# EAGLE board MCU v19 (EAGLE 9.7.0)
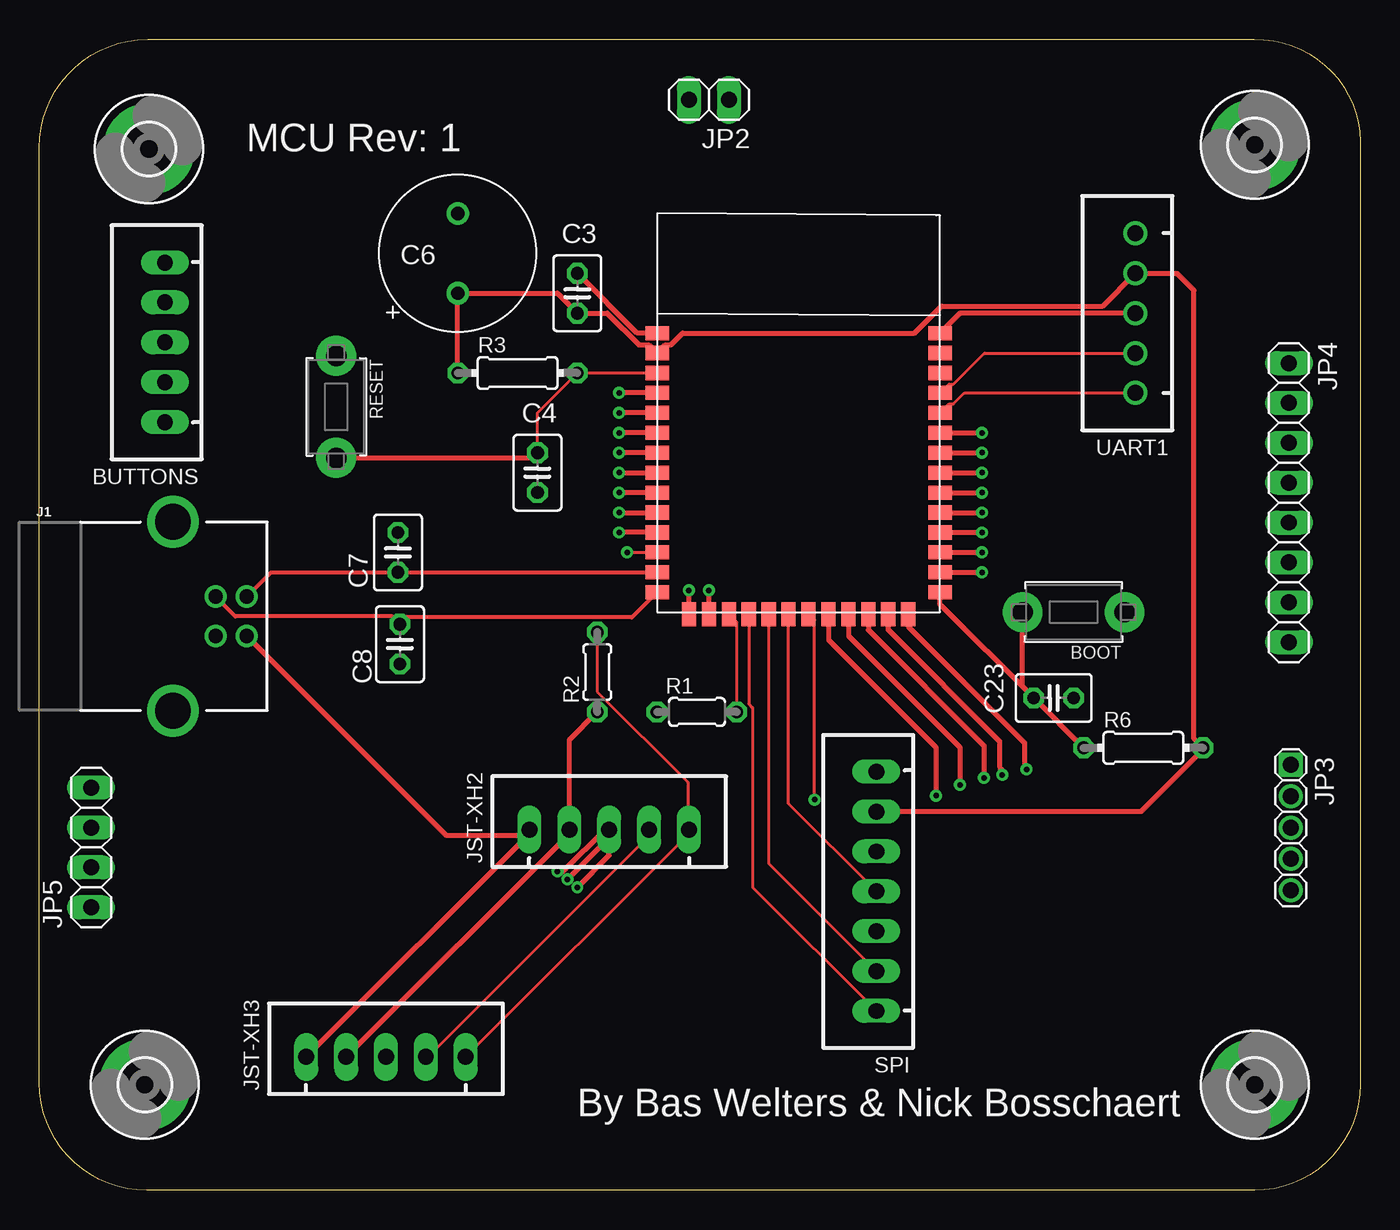
[diagram p0: board, top side]
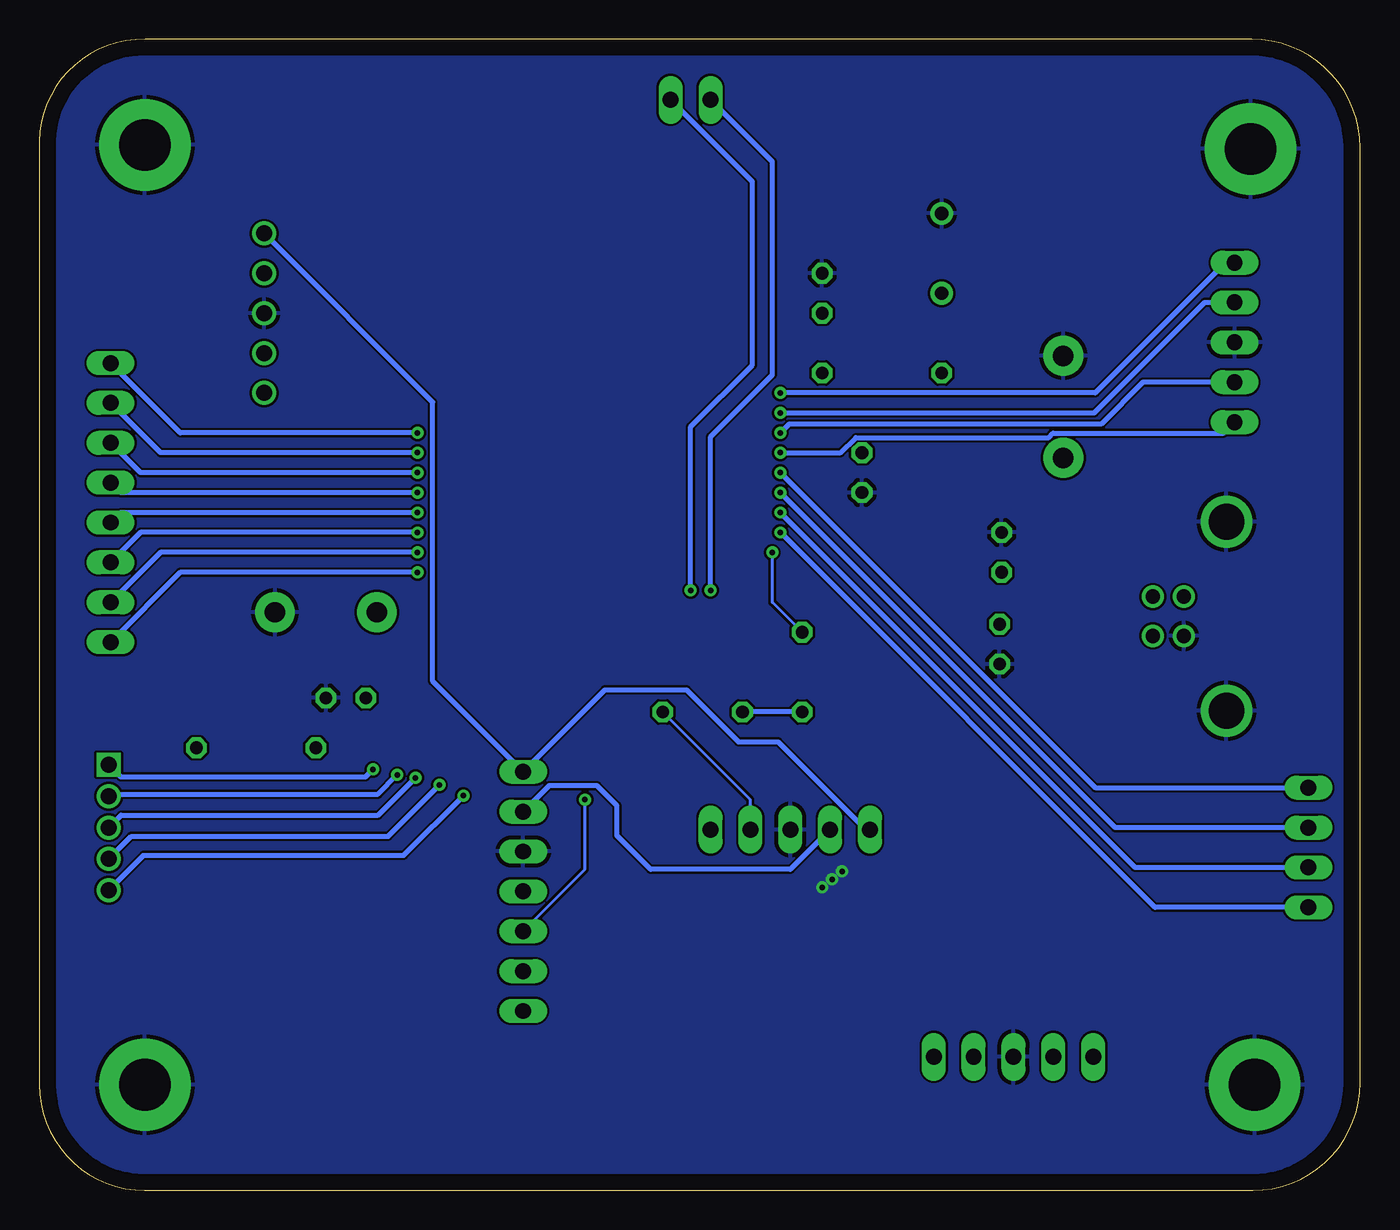
[diagram p1: board, bottom side, seen from below]

Size 84.18 x 73.33 mm. Coordinates in mm from the lower left corner, seen from the top.
Outline: 6.86,0 arc-90 0,6.86 0,66.42 arc-90 6.91,73.33 77.44,73.33 arc-90 84.18,66.84 84.18,6.73 arc-90 77.45,0 6.86,0
Copper layers (1*16): Top 0.035mm / dielectric 1.5mm / Bottom 0.035mm
Design rules "default": minimum track width 6mil, minimum drill 0.35mm, track to track 6mil, track to pad 6mil, pad to pad 6mil, via to via 6mil, smd to smd 6mil, copper to edge 40mil, drill to drill 6mil, minimum pad ring 10mil, minimum via ring 8mil, stop-mask expansion 4mil, vias tented up to drill 0mil, thermal gap 10mil

## Footprints (pad centres in the part's own frame; a part is rotated, then mirrored left to right if it is on the bottom)
TACT_PANA-EVQ = drill 1.3 pad 2.54: P$1 -3.25,0; P$2 3.25,0
JST-XH-05-PACKAGE-LONG-PAD = drill 1.016 long: 1 -5.08,0; 2 -2.54,0; 3 0,0; 4 2.54,0; 5 5.08,0
C025-030X050 = drill 0.813 octagon: 1 -1.27,0; 2 1.27,0
CAPPRD508W65D1000H1100B = drill 0.85 pad 1.45: 1 -2.54,0; 2 2.54,0
3,3-PAD = drill 3.3 pad 5.842: B3,3 0,0
USB-B-PTH = drill 0.914 pad 1.422: D+ 4,1.25; D- 5.981,1.25; GND 4,-1.25; VBUS 5.981,-1.25 | drill 2.286: SHLD1 1.282,-6.02; SHLD2 1.282,6.02
1X02 = drill 1.016 long: 1 -1.27,0; 2 1.27,0
1_05X2MM = drill 1.016 pad 1.3 square: 1 -4,0 | drill 1.016 pad 1.3: 2 -2,0; 3 0,0; 4 2,0; 5 4,0
1X08 = drill 1.016 long: 1 -8.89,0; 2 -6.35,0; 3 -3.81,0; 4 -1.27,0; 5 1.27,0; 6 3.81,0; 7 6.35,0; 8 8.89,0
1X04 = drill 1.016 long: 1 -3.81,0; 2 -1.27,0; 3 1.27,0; 4 3.81,0
0204/5 = drill 0.813 octagon: 1 -2.54,0; 2 2.54,0
0204/7 = drill 0.813 octagon: 1 -3.81,0; 2 3.81,0
JST-XH-07-PACKAGE-LONG-PAD = drill 1.016 long: 1 -7.62,0; 2 -5.08,0; 3 -2.54,0; 4 0,0; 5 2.54,0; 6 5.08,0; 7 7.62,0
ESP32-S3-WROOM-1 = smd 1.5 x 0.9: 3V3 0,-8.89; EN 0,-10.16; GND1 0,-7.62; GND2 18.034,-7.62; IO0 18.034,-24.13; IO1 18.034,-8.89; IO2 18.034,-10.16; IO4 0,-11.43; IO5 0,-12.7; IO6 0,-13.97; IO7 0,-15.24; IO8 0,-21.59; IO15 0,-16.51; IO16 0,-17.78; IO17 0,-19.05; IO18 0,-20.32; IO19 0,-22.86; IO20 0,-24.13; IO35 18.034,-22.86; IO36 18.034,-21.59; IO37 18.034,-20.32; IO38 18.034,-19.05; IO39 18.034,-17.78; IO40 18.034,-16.51; IO41 18.034,-15.24; IO42 18.034,-13.97; RXD0 18.034,-12.7; TXD0 18.034,-11.43 | smd 0.9 x 1.5: IO3 2.032,-25.527; IO9 4.572,-25.527; IO10 5.842,-25.527; IO11 7.112,-25.527; IO12 8.382,-25.527; IO13 9.652,-25.527; IO14 10.922,-25.527; IO21 12.192,-25.527; IO45 16.002,-25.527; IO46 3.302,-25.527; IO47 13.462,-25.527; IO48 14.732,-25.527
JST-XH-05-PACKAGE-ROUND-PAD = drill 1.016: 1 -5.08,0; 2 -2.54,0; 3 0,0; 4 2.54,0; 5 5.08,0

## Placement (x,y rotation side)
BOOT  [TACT_PANA-EVQ]  65.91,36.83 180 top
BUTTONS  Control Buttons  [JST-XH-05-PACKAGE-LONG-PAD]  8.01,54.03 90 top
C3  0.1uF  [C025-030X050]  34.29,57.15 90 top
C4  0.1uF  [C025-030X050]  31.75,45.72 90 top
C6  10uF  [CAPPRD508W65D1000H1100B]  26.67,59.69 90 top
C7  TBD  [C025-030X050]  22.86,40.64 90 top
C8  TBD  [C025-030X050]  22.99,34.8 270 top
C23  0.1uF  [C025-030X050]  64.64,31.37 180 top
H1  MOUNT-PAD-ROUND3.3  [3,3-PAD]  77.45,6.73 0 top
H2  MOUNT-PAD-ROUND3.3  [3,3-PAD]  6.73,6.73 0 top
H3  MOUNT-PAD-ROUND3.3  [3,3-PAD]  77.45,66.6 0 top
H4  MOUNT-PAD-ROUND3.3  [3,3-PAD]  6.99,66.34 0 top
J1  USB_B_PTH  [USB-B-PTH]  7.24,36.58 0 top
JP2  [1X02]  42.67,69.47 180 top
JP3  [1_05X2MM]  79.76,23.11 270 top
JP4  [1X08]  79.63,43.81 270 top
JP5  [1X04]  3.3,21.84 90 top
JST-XH2  I2C-BUS  [JST-XH-05-PACKAGE-LONG-PAD]  36.32,22.99 0 top
JST-XH3  I2C-BUS  [JST-XH-05-PACKAGE-LONG-PAD]  22.1,8.51 0 top
R1  2k2  [0204/5]  41.91,30.48 0 top
R2  2k2  [0204/5]  35.56,33.02 90 top
R3  10k  [0204/7]  30.48,52.07 0 top
R6  10k  [0204/7]  70.36,28.19 0 top
RESET  [TACT_PANA-EVQ]  18.92,49.91 270 top
SPI  SPI-Header  [JST-XH-07-PACKAGE-LONG-PAD]  53.34,19.05 90 top
U$1  ESP32-S3-WROOM-1  [ESP32-S3-WROOM-1]  39.37,62.23 0 top
UART1  UART  [JST-XH-05-PACKAGE-ROUND-PAD]  69.85,55.88 90 top

## Library data of the parts
BOOT RESET = adafruit
BUTTONS JST-XH2 JST-XH3 SPI UART1 = Rembrandt Electronics - JST XH Connectors v1-0
C3 C4 C7 C8 C23 = rcl; SPICEPREFIX: C
C6 = Capacitor; CATEGORY: Capacitor
H1-H4 = holes
J1 = SparkFun-Connectors; PROD_ID: CONN-08278; SF_ID: PRT-00139
JP2-JP5 = pinhead
R1-R3 R6 = rcl; SPICEPREFIX: R
U$1 = RobotMower_Eagle_Library

## Nets
3V3: C3.1 C6.1 JST-XH2.2 JST-XH3.2 R1.1 R2.1 R3.1 R6.2 SPI.6 U$1.3V3 UART1.4
5V: J1.VBUS JST-XH2.1 JST-XH3.1 SPI.7 UART1.5
B1: BUTTONS.5 U$1.IO4
B2: BUTTONS.4 U$1.IO5
B3: BUTTONS.2 U$1.IO6
B4: BUTTONS.1 U$1.IO7
BOOT: BOOT.P$2 C23.2 R6.1 U$1.IO0
CS: SPI.1 U$1.IO10
D+: C8.1 J1.D+ U$1.IO20
D-: C7.1 J1.D- U$1.IO19
EN: C4.2 R3.2 RESET.P$2 U$1.EN
GND: BOOT.P$1 BUTTONS.3 C3.2 C4.1 C6.2 C7.2 C8.2 C23.1 H1.B3,3 H2.B3,3 H3.B3,3 H4.B3,3 J1.GND J1.SHLD1 J1.SHLD2 JST-XH2.3 JST-XH3.3 RESET.P$1 SPI.5 U$1.GND1 U$1.GND2 UART1.3
IO3: JP2.2 U$1.IO3
IO14: JP3.5 U$1.IO14
IO15: JP5.4 U$1.IO15
IO16: JP5.3 U$1.IO16
IO17: JP5.2 U$1.IO17
IO18: JP5.1 U$1.IO18
IO21: JP3.4 U$1.IO21
IO35: JP4.8 U$1.IO35
IO36: JP4.7 U$1.IO36
IO37: JP4.6 U$1.IO37
IO38: JP4.5 U$1.IO38
IO39: JP4.4 U$1.IO39
IO40: JP4.3 U$1.IO40
IO41: JP4.2 U$1.IO41
IO42: JP4.1 U$1.IO42
IO45: JP3.1 U$1.IO45
IO46: JP2.1 U$1.IO46
IO47: JP3.3 U$1.IO47
IO48: JP3.2 U$1.IO48
MISO: SPI.3 U$1.IO13
MOSI: SPI.2 U$1.IO11
RX: U$1.RXD0 UART1.1
SCK: SPI.4 U$1.IO12
SCL: JST-XH2.5 JST-XH3.5 R2.2 U$1.IO8
SDA: JST-XH2.4 JST-XH3.4 R1.2 U$1.IO9
TX: U$1.TXD0 UART1.2

## Tracks (layer width: path | path; a pad name or v marks a point on that pad's centre or on a via)
3V3
  Top 0.305: R3.1 C6.1 33.02,57.15 C3.1 36.18,55.88 38.21,53.85 38.85,53.85 U$1.3V3 39.88,53.85 40.25,53.85 41,54.61 55.77,54.61 57.5,56.34 67.77,56.34 UART1.4 69.87,58.4 72.52,58.4 73.58,57.34 73.58,28.78 R6.2 74.17,28.1 70.2,24.13 SPI.6 | JST-XH3.2 33.78,22.73 JST-XH2.2 33.78,28.7 R2.1
  Bottom 0.305: SPI.6 51.69,25.78 48.64,25.78 47.37,24.51 47.37,22.61 45.21,20.45 36.32,20.45 JST-XH2.2 | R2.1 R1.1
5V
  Top 0.305: J1.VBUS 25.93,22.61 30.87,22.61 JST-XH2.1 31.24,22.73 JST-XH3.1
  Bottom 0.305: UART1.5 59.11,50.22 59.11,32.44 SPI.7 48.13,31.88 42.93,31.88 39.62,28.57 37.1,28.57 31.51,22.99 JST-XH2.1
B1  (via drill 0.35)
  Top 0.305: U$1.IO4 v36.96,50.8
  Bottom 0.305: BUTTONS.5 8.59,59.11 16.89,50.8 v36.96,50.8
B2  (via drill 0.35)
  Top 0.305: U$1.IO5 v36.96,49.53
  Bottom 0.305: v36.96,49.53 16.95,49.53 9.91,56.57 BUTTONS.4
B3  (via drill 0.35)
  Top 0.305: U$1.IO6 v36.96,48.26
  Bottom 0.305: BUTTONS.2 13.84,51.49 16.51,48.82 36.4,48.82 v36.96,48.26
B4  (via drill 0.35)
  Top 0.305: U$1.IO7 v36.96,46.99
  Bottom 0.305: BUTTONS.1 8.72,48.24 19.58,48.24 19.86,47.95 32.15,47.95 33.12,46.99 v36.96,46.99
BOOT
  Top 0.305: C23.2 57.4,37.34 U$1.IO0 | C23.2 62.66,32.08 BOOT.P$2 | C23.2 R6.1
CS
  Top 0.203: U$1.IO10 45.21,31.01 45.47,30.76 45.47,19.3 SPI.1
D+
  Top 0.254: U$1.IO20 37.77,36.5 23.42,36.5 C8.1 22.48,36.57 12.49,36.57 J1.D+
D-
  Top 0.254: J1.D- 14.76,39.37 C7.1 U$1.IO19
EN
  Top 0.203: U$1.EN R3.2 31.75,49.53 31.75,47.12 C4.2
  Top 0.305: RESET.P$2 31.29,46.66 31.75,47.12
GND  (via drill 0.35)
  Top 0.305: U$1.GND1 38.1,54.61 C3.2 | U$1.GND2 58.67,55.88 UART1.3 | v33.65,19.81 36.32,22.48 JST-XH2.3 | v33.02,20.32 33.39,20.32 36.05,22.99 JST-XH2.3 | v34.29,19.3 36.32,21.34 JST-XH2.3
  pour Bottom: -0.69,0.84 84.51,0.84 84.51,73.2 -0.69,73.2
IO3  (via drill 0.35)
  Top 0.305: U$1.IO3 v41.4,38.23
  Bottom 0.305: v41.4,38.23 41.4,48.01 37.46,51.94 37.46,65.53 JP2.2
IO14  (via drill 0.35)
  Top 0.305: U$1.IO14 50.3,35.06 57.15,28.21 v57.15,25.15
  Bottom 0.305: v57.15,25.15 60.96,21.34 77.53,21.34 JP3.5
IO15  (via drill 0.35)
  Top 0.305: v36.96,45.72 U$1.IO15
  Bottom 0.305: v36.96,45.72 16.89,25.65 JP5.4
IO16  (via drill 0.35)
  Top 0.305: U$1.IO16 v36.96,44.45
  Bottom 0.305: JP5.3 15.62,23.11 v36.96,44.45
IO17  (via drill 0.35)
  Top 0.305: v36.96,43.18 U$1.IO17
  Bottom 0.305: v36.96,43.18 14.35,20.57 JP5.2
IO18  (via drill 0.35)
  Top 0.305: U$1.IO18 v36.96,41.91
  Bottom 0.305: JP5.1 13.08,18.03 v36.96,41.91
IO21  (via drill 0.35)
  Top 0.305: U$1.IO21 51.57,35.32 58.67,28.21 v58.67,25.83
  Bottom 0.305: JP3.4 78.31,22.55 61.95,22.55 v58.67,25.83
IO35  (via drill 0.35)
  Top 0.305: U$1.IO35 v60.07,39.37
  Bottom 0.305: v60.07,39.37 75.18,39.37 JP4.8
IO36  (via drill 0.35)
  Top 0.305: U$1.IO36 v60.07,40.64
  Bottom 0.305: v60.07,40.64 76.45,40.64 JP4.7
IO37  (via drill 0.35)
  Top 0.305: U$1.IO37 v60.07,41.91
  Bottom 0.305: v60.07,41.91 77.72,41.91 JP4.6
IO38  (via drill 0.35)
  Top 0.305: U$1.IO38 v60.07,43.18
  Bottom 0.305: v60.07,43.18 78.99,43.18 JP4.5
IO39  (via drill 0.35)
  Top 0.305: U$1.IO39 v60.07,44.45
  Bottom 0.305: v60.07,44.45 78.99,44.45 JP4.4
IO40  (via drill 0.35)
  Top 0.305: U$1.IO40 v60.07,45.72
  Bottom 0.305: v60.07,45.72 77.72,45.72 JP4.3
IO41  (via drill 0.35)
  Top 0.305: U$1.IO41 v60.07,46.99
  Bottom 0.305: v60.07,46.99 76.45,46.99 JP4.2
IO42  (via drill 0.35)
  Top 0.305: U$1.IO42 v60.07,48.26
  Bottom 0.305: JP4.1 75.18,48.26 v60.07,48.26
IO45  (via drill 0.35)
  Top 0.305: U$1.IO45 55.37,35.94 62.79,28.52 62.79,26.94 v62.91,26.82
  Bottom 0.305: JP3.1 78.98,26.34 63.39,26.34 v62.91,26.82
IO46  (via drill 0.35)
  Top 0.305: U$1.IO46 v42.67,38.23
  Bottom 0.305: v42.67,38.23 42.67,48.64 38.74,52.58 38.74,64.26 JP2.1
IO47  (via drill 0.35)
  Top 0.305: U$1.IO47 52.84,35.7 60.2,28.34 v60.2,26.29
  Bottom 0.305: JP3.3 78.97,23.9 62.58,23.9 v60.2,26.29
IO48  (via drill 0.35)
  Top 0.305: U$1.IO48 54.11,35.7 61.19,28.62 61.19,26.97 61.37,26.79 v61.37,26.47
  Bottom 0.305: JP3.2 79.62,25.25 62.59,25.25 v61.37,26.47
MISO  (via drill 0.35)
  Top 0.203: v49.4,24.89 49.4,36.32 U$1.IO13
  Bottom 0.203: SPI.3 49.4,20.45 v49.4,24.89
MOSI
  Top 0.203: U$1.IO11 46.48,20.83 SPI.2
RX
  Top 0.203: U$1.RXD0 57.97,50.1 58.26,50.1 58.96,50.8 UART1.1
SCK
  Top 0.203: SPI.4 47.75,24.64 U$1.IO12
SCL  (via drill 0.35)
  Top 0.203: R2.2 35.56,31.77 41.34,25.99 41.34,22.92 | v37.46,40.64 U$1.IO8 | JST-XH3.5 41.34,22.67 41.34,22.92 | 41.34,22.92 JST-XH2.5
  Bottom 0.203: R2.2 37.46,37.46 v37.46,40.64
SDA
  Top 0.203: R1.2 44.45,36.2 U$1.IO9 | JST-XH2.4 38.86,22.6 24.89,8.63 24.89,8.51 JST-XH3.4
  Bottom 0.203: JST-XH2.4 38.86,24.89 R1.2
TX
  Top 0.203: U$1.TXD0 57.97,51.37 58.26,51.37 60.23,53.34 UART1.2
(copper drawn outside any net)
  shapes: Bottom area x1

## Text on the board
tPlace: MCU Rev: 1 | By Bas Welters & Nick Bosschaert